# Altium PCB Battery_Operated Node.PcbDoc
Units mm, origin at the board's own origin, x right, y up, seen from the top; angles counter-clockwise.
Board outline 41.22 x 57.73 mm, 2 copper layers (Top, Bottom), stack 1.57 mm thick; 62 components, 53 nets, 236 pads, 55 vias.
Unrouted connection lines stored in the file: 1.
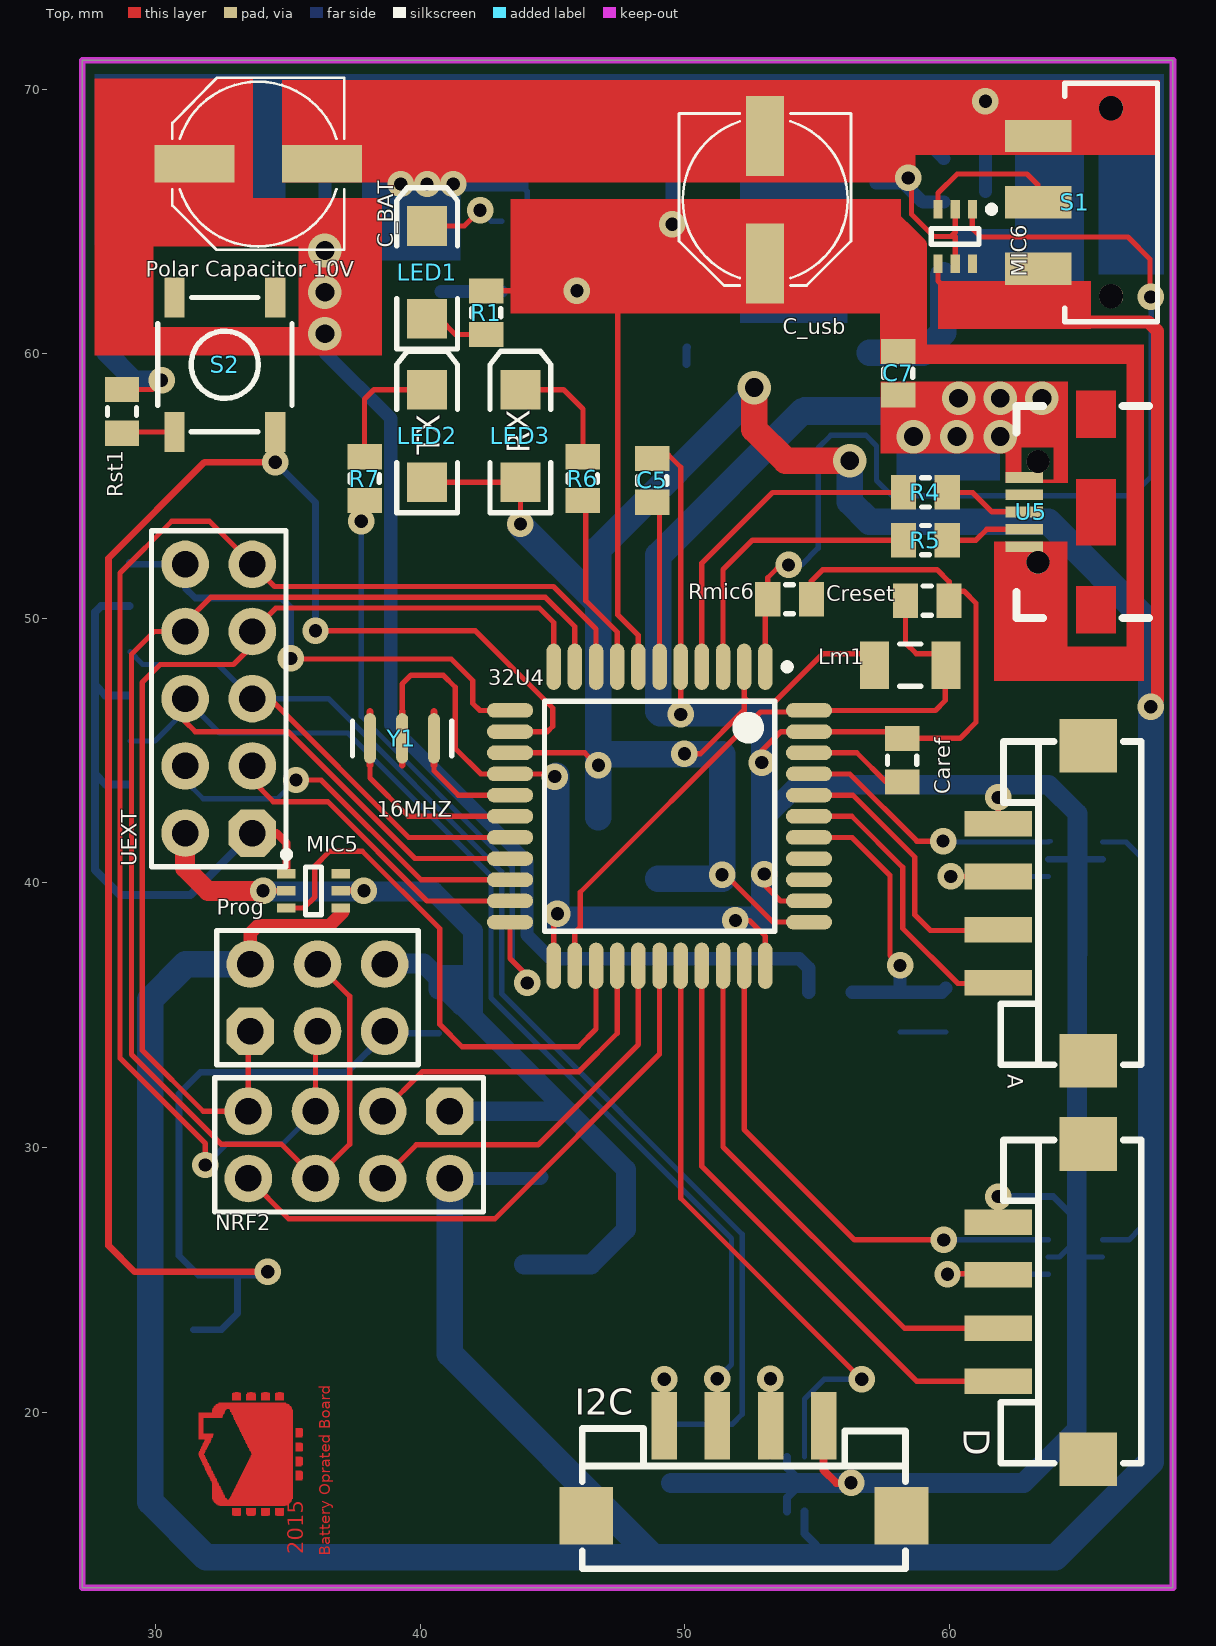
[diagram p0: Top view]
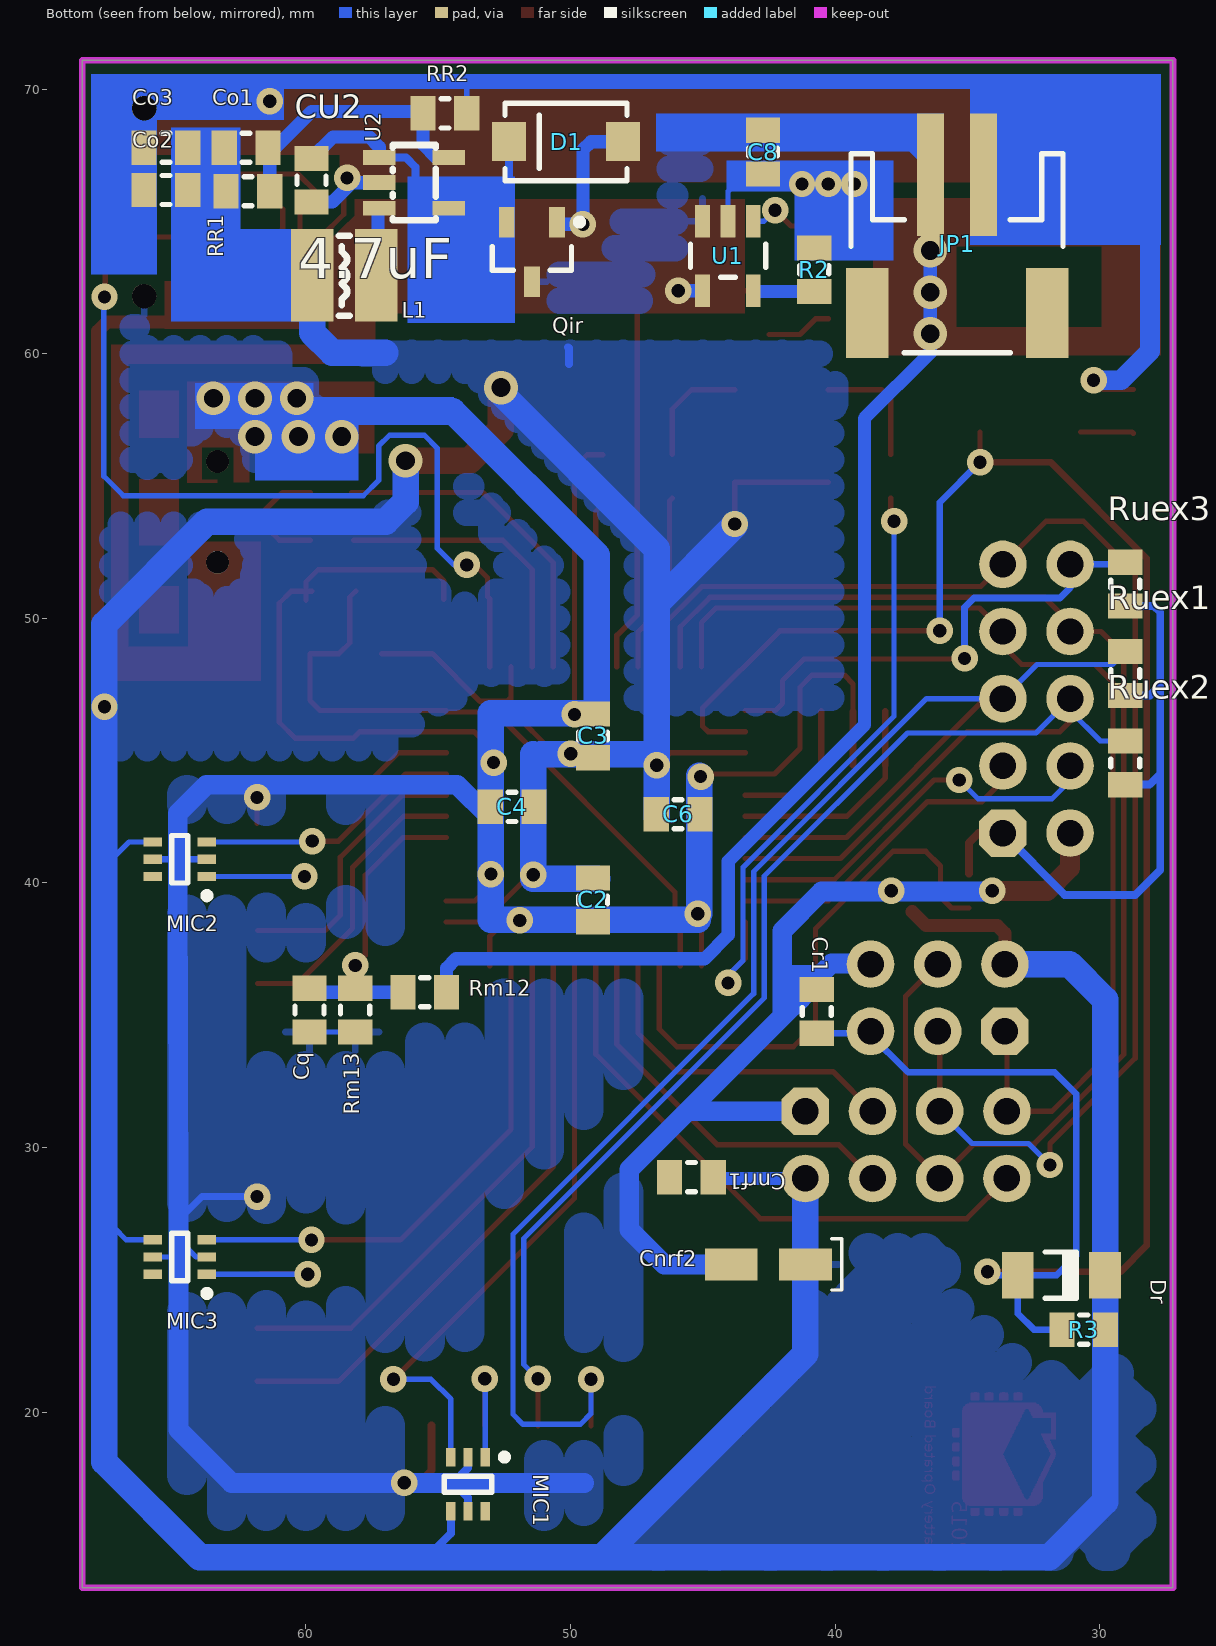
[diagram p1: Bottom view, seen from below]
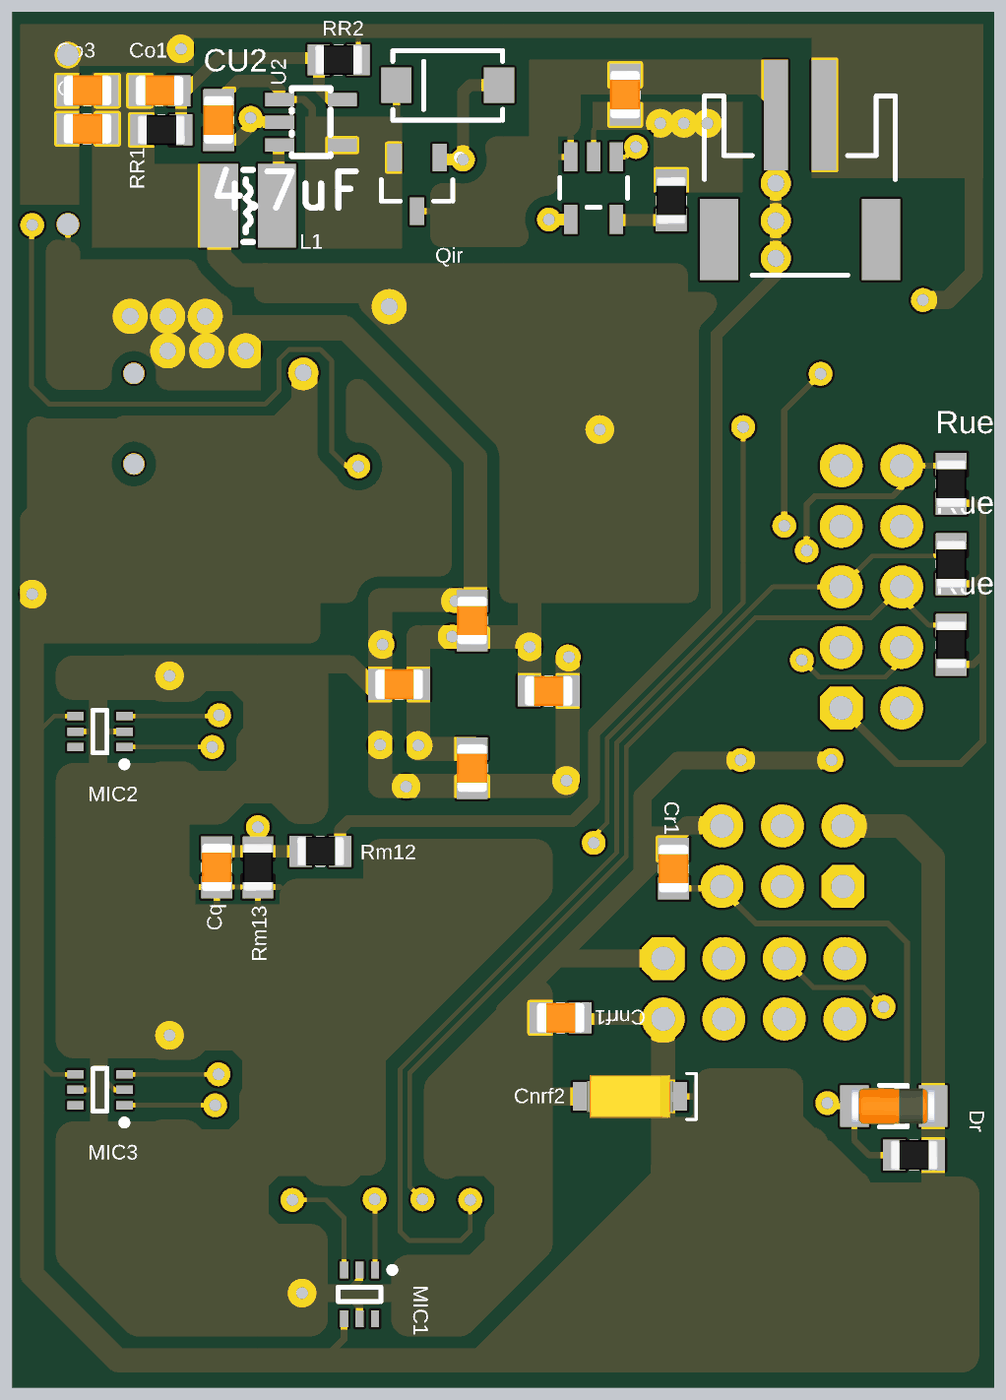
[diagram p2: 3D render of the assembled board from below, using the file's embedded part models]

## Layer stack, top to bottom
Top Solder: solder mask 0.0102, Solder Resist, Dk 3.5
Top: signal copper 0.035
Dielectric 1: core 1.5, FR-4, Dk 4.8
Bottom: signal copper 0.035
Bottom Solder: solder mask 0.0102, Solder Resist, Dk 3.5

## Board outline
27.229,13.36 27.229,71.095 68.453,71.095 68.453,13.36

## Design rules (kind name [scope] priority, off if disabled: settings)
Clearance POLY [InPolygon] p1: gap=0.5
Clearance mdViaVia [IsVia vs IsVia] p2: gap=0.203
Clearance mdPadVia [IsPad vs IsVia] p3: gap=0.203
Clearance mdPadPad [IsPad vs IsPad] p4: gap=0.203
Clearance mdWireVia [(InLayerClass('Signal Layers') AND IsTrack) vs IsVia] p5: gap=0.203
Clearance mdWirePad [(InLayerClass('Signal Layers') AND IsTrack) vs IsPad] p6: gap=0.203
Clearance mdWireWire [(InLayerClass('Signal Layers') AND IsTrack) vs (InLayerClass('Signal Layers') AND IsTrack)] p7: gap=0.203
Clearance [All] p8: gap=0.2
HoleSize [All] p1: absolutevalues=TRUE maxlimit=2540 minlimit=0.381 maxpercent=80.000 minpercent=20.000
HoleToHoleClearance [All] p1: gap=0.203 allowstackedmicrovias=TRUE
PolygonConnect ThermalVias [IsVia] p1: connectstyle=Direct reliefconductorwidth=0.254 reliefentries=4 polygonreliefangle="90 Angle" airgapwidth=0.254
PolygonConnect [All] p2: connectstyle=Relief reliefconductorwidth=0.254 reliefentries=4 polygonreliefangle="90 Angle" airgapwidth=0.254
RoutingVias [All] p1: holewidth=0.5 width=1 viastyle="Through Hole" minholewidth=0.5 minwidth=1 maxholewidth=0.711 maxwidth=1.27
SilkToSilkClearance [All] p1 off: silktosilkclearance=0.254
SilkToSolderMaskClearance [IsPad] p1 off: minsilkscreentomaskgap=0.254 clearancetoexposedcopper=TRUE
SolderMaskExpansion [All] p1: expansion=0.102
Width [All] p1: maxlimit=2540 minlimit=0.2 preferedwidth=0.254
26 further rules are at their usual default settings.

## Components (designator, comment, footprint, x,y, rotation, side; value= is the part's Value field where it differs from the comment)
32U4 "ATmega32U4-AU" 44ML_N 49.047,42.52 r270 top
A "TWIG-4P-2.0-SMD" 4P-SMD-2.0 61.849,39.243 r270 top
C2 "100nF" SMD_CAP_0805 49.149,38.532 r90 bottom
C3 "100nF" SMD_CAP_0805 49.149,46.38 r270 bottom
C4 "100nF" SMD_CAP_0805 53.035,42.875 r180 bottom
C5 "1uF" SMD_CAP_0805 48.768,56.038 r270 top
C6 "4.7uF" SMD_CAP_0805 45.11,42.596 r0 bottom
C7 "4.7uF" SMD_CAP_0805 58.064,58.445 r90 top
C8 "4.7uF" SMD_CAP_0805 42.723,66.802 r90 bottom
C_BAT "Polar Capacitor 10V" PANASONIC_D 33.884,67.183 r180 top
C_usb "Polar Capacitor 10V" PANASONIC_D 53.035,65.837 r270 top
Caref "100nF" SMD_CAP_0805 58.217,45.466 r270 top
Cnrf1 "100nF" SMD_CAP_0805 44.602,28.88 r0 bottom
Cnrf2 "4.7uF 6.3V Tantalum" "CAPP 1206 (3216X18L) Size A" 41.123,25.578 r0 bottom
Co1 "22pF" SMD_CAP_0805 61.441,67.793 r0 bottom
Co2 "22uF" SMD_CAP_0805 66.116,66.192 r180 bottom
Co3 "22uF" SMD_CAP_0805 66.116,67.793 r180 bottom
Cq "100nF" SMD_CAP_0805 59.868,36.017 r270 bottom
Cr1 "4.7nF" SMD_CAP_0805 40.691,34.315 r90 bottom
Creset "10nF" SMD_CAP_0805 59.995,50.673 r180 top
CU2 "4.7uF" SMD_CAP_0805 59.792,65.735 r90 bottom
D "TWIG-4P-2.0-SMD" 4P-SMD-2.0 61.849,24.181 r270 top
D1 "B340A" SMA-DIODE 50.165,68.021 r0 bottom
Dr "1N4148" LL4148 31.445,25.171 r180 bottom
I2C "TWIG-4P-2.0-SMD" 4P-SMD-2.0 52.248,19.482 r180 top
JP1 "JST-2" JST-2-SMD 35.382,63.068 r0 bottom
L1 "2.2uH/1.5A/DCR<0.1R/CD32" CD32 58.547,62.967 r0 bottom
LED1 "RED" "LED SMD 1206" 40.259,63.081 r90 top
LED2 "Orange" "LED SMD 1206" 40.259,56.896 r90 top
LED3 "Green" "LED SMD 1206" 43.79,56.896 r90 top
Lm1 "Inductor" INDC3216 58.522,48.235 r180 top
MIC1 "MIC94060" mic94060 53.873,17.272 r270 bottom
MIC2 "MIC94060" mic94060 64.77,40.894 r0 bottom
MIC3 "MIC94060" mic94060 64.77,25.857 r0 bottom
MIC5 "MIC94060" mic94060 35.966,39.7 r0 top (schematic designator MIC1)
MIC6 "MIC94060" mic94060 60.223,64.44 r270 top (schematic designator MIC1)
NRF2 "Header 4X2" HDR2X4 41.123,31.369 r180 top
Prog "Header 3X2" HDR2X3 33.579,34.392 r0 top
Qir "IRLML6401" Micro3_N 51.46,63.856 r270 bottom
R1 "330" "RES 0805 (2012X06L)" 42.494,62.381 r270 top
R2 "10k" "RES 0805 (2012X06L)" 40.792,62.357 r90 bottom
R3 "4.7k" "RES 0805 (2012X06L)" 31.42,23.114 r180 bottom
R4 "22" "RES 0805 (2012X06L)" 59.922,54.762 r180 top
R5 "22" "RES 0805 (2012X06L)" 59.922,52.959 r180 top
R6 "330" "RES 0805 (2012X06L)" 46.152,56.112 r270 top
R7 "330" "RES 0805 (2012X06L)" 37.897,56.112 r270 top
Rm12 "1M" "RES 0805 (2012X06L)" 54.686,35.865 r0 bottom
Rm13 "470K" "RES 0805 (2012X06L)" 58.141,36.017 r270 bottom
Rmic6 "4.7K" "RES 0805 (2012X06L)" 53.137,50.721 r0 top
RR1 "4.99K" "RES 0805 (2012X06L)" 63.017,66.144 r180 bottom
RR2 "1.1K" "RES 0805 (2012X06L)" 53.924,69.088 r0 bottom
Rst1 "330" "RES 0805 (2012X06L)" 28.727,58.649 r270 top
Ruex1 "4.7K" "RES 0805 (2012X06L)" 29.032,47.092 r90 bottom
Ruex2 "4.7K" "RES 0805 (2012X06L)" 29.032,43.713 r90 bottom
Ruex3 "4.7K" "RES 0805 (2012X06L)" 29.032,50.47 r90 bottom
S1 "" SWITCH-SPDT-SMD 66.116,65.735 r270 top
S2 "!RESET" TACTILE_SWITCH_SMD 32.614,59.588 r90 top
U1 "MCP73831" SOT23-5#1 44.044,63.71 r0 bottom
U2 "SY8009AAAC(SOT23-5)" SOT23-5#2 55.905,66.472 r0 bottom (schematic designator U1)
U5 "USB AB Connector(micro usb)" USB-AB-MICRO-SMD_V03 65.557,54.026 r180 top
UEXT "Header 5X2" HDR2X5 33.655,41.885 r90 top
Y1 "16MHZ" RESONATOR-SMD 39.319,45.466 r180 top

## Footprints (in the part's own frame and the unit in brackets; to place one, negate y for a bottom-side part, rotate by r counter-clockwise, add the part's x,y. Pads: shape width x height; smd on the part's side, far side on the other; paste and mask are expansions set on the pad)
4P-SMD-2.0 [mil]
  rect 38x100 smd: 1(-118.11,0) 2(-39.37,0) 3(40,0) 4(119,0)
  rect 80x86 smd: SS1(-234.09,134) SS2(235,134)
  silkscreen extent -240,4 241,213
44ML_N [mm] "Thin QFP, 44-Leads, Body 10x10mm, Pitch 0.8mm, IPC Medium Density"
  oval 1.75x0.55 smd: 1(-5.65,4) 2(-5.65,3.2) 3(-5.65,2.4) 4(-5.65,1.6) 5(-5.65,0.8) 6(-5.65,0) 7(-5.65,-0.8) 8(-5.65,-1.6) 9(-5.65,-2.4) 10(-5.65,-3.2) 11(-5.65,-4) 23(5.65,-4) 24(5.65,-3.2) 25(5.65,-2.4) 26(5.65,-1.6) 27(5.65,-0.8) 28(5.65,0) 29(5.65,0.8) 30(5.65,1.6) 31(5.65,2.4) 32(5.65,3.2) 33(5.65,4)
  oval 0.55x1.75 smd: 12(-4,-5.65) 13(-3.2,-5.65) 14(-2.4,-5.65) 15(-1.6,-5.65) 16(-0.8,-5.65) 17(0,-5.65) 18(0.8,-5.65) 19(1.6,-5.65) 20(2.4,-5.65) 21(3.2,-5.65) 22(4,-5.65) 34(4,5.65) 35(3.2,5.65) 36(2.4,5.65) 37(1.6,5.65) 38(0.8,5.65) 39(0,5.65) 40(-0.8,5.65) 41(-1.6,5.65) 42(-2.4,5.65) 43(-3.2,5.65) 44(-4,5.65)
  silkscreen extent -5.77,-4.35 4.35,4.95, body extent -5,-5 5,5, height 1.2
"CAPP 1206 (3216X18L) Size A" [mm] "Chip Capacitor, 2-Leads, Body 3.2x1.6mm, IPC High Density, chip Tantalum"
  rect 1.999x1.199 smd: 1(0,0) 2(2.8,0)
  silkscreen extent -1.38,-0.97 -0.99,0.97, body extent -0.43,-0.9 3.21,0.9, height 1.8
CD32 [mil] "CD32"
  rect 63x138 smd: 1(-47.24,0) 2(48,0)
  silkscreen extent -8,-59 8,60
HDR2X3 [mm]
  oct 1.8x1.8 hole 1: 1(0,0)
  round 1.8 hole 1: 2(0,2.54) 3(2.54,0) 4(2.54,2.54) 5(5.08,0) 6(5.08,2.54)
  silkscreen extent -1.27,-1.27 6.35,3.81
HDR2X4 [mm]
  oct 1.8x1.8 hole 1: 1(0,0)
  round 1.8 hole 1: 2(0,2.54) 3(2.54,0) 4(2.54,2.54) 5(5.08,0) 6(5.08,2.54) 7(7.62,0) 8(7.62,2.54)
  silkscreen extent -1.27,-1.27 8.89,3.81
HDR2X5 [mm]
  oct 1.8x1.8 hole 1: 1(0,0)
  round 1.8 hole 1: 2(0,2.54) 3(2.54,0) 4(2.54,2.54) 5(5.08,0) 6(5.08,2.54) 7(7.62,0) 8(7.62,2.54) 9(10.16,0) 10(10.16,2.54)
  silkscreen extent -1.27,-1.27 11.43,3.81
INDC3216 [mm] "Chip Inductor, Body 3.2x1.6mm, IPC High Density"
  rect 1.1x1.8 smd: 1(-1.35,0) 2(1.35,0)
  silkscreen extent -0.4,-0.8 0.4,0.8
JST-2-SMD [mil] "JST-2-SMD"
  rect 40x182 smd: 1(-39.37,-145.67) 2(40,-145.67)
  rect 63x134 smd: NC1(-133.86,60) NC2(134,60)
  silkscreen extent -157,-177 158,119
"LED SMD 1206" [mm]
  rect 1.5x1.5 smd: 1(-1.75,0) 2(1.75,0)
  silkscreen extent -2.9,-1.15 3.2,1.15, body extent -1.65,-0.76 1.65,0.69, height 1.36
LL4148 [mm] "MELF Diode, 2-Leads, Body 3.5x1.4mm, IPC Medium Density"
  rect 1.2x1.75 smd: 1(-1.65,0) 2(1.65,0)
  silkscreen extent -0.61,-0.88 0.57,0.88, body extent -1.78,-0.75 1.72,0.75, height 1.55
mic94060 [mm] "6 pin sc70"
  rect 0.7x0.35 smd: 1(-1.025,0.65) 2(-1.025,0) 3(-1.025,-0.65) 4(1.025,-0.65) 5(1.025,0) 6(1.025,0.65)
  silkscreen extent -1.15,-0.9 0.3,1.5, body extent -0.58,-0.9 0.58,0.9, height 1.1
Micro3_N [mm] "SOT23, 3-Leads, Body 2.9x1.3mm, Pitch 0.95mm, Lead Span 2.3mm, IPC Medium Density"
  rect 1.15x0.6 smd: 1(-1.125,0.95) 2(-1.125,-0.95) 3(1.125,0)
  silkscreen extent -1.25,-1.5 0.7,1.92, body extent -0.7,-1.5 0.7,1.5, height 1.12
PANASONIC_D [mil]
  rect 119x56 smd: +(95,0) -(-94.49,0)
  silkscreen extent -128,-128 128,128
"RES 0805 (2012X06L)" [mm] "Chip Resistor, 2-Leads, Body 2.0x1.3mm, IPC High Density _ (0.100 W)"
  rect 0.95x1.3 smd: 1(0,0) 2(1.65,0)
  silkscreen extent 0.67,-0.55 0.97,0.55, body extent -0.19,-0.63 1.84,0.64, height 0.6
RESONATOR-SMD [mil]
  rrect100% 18x75 smd: 1(-47.24,0) 2(0,0) 3(48,0)
  Top lines w10: 48,40 48,0 48,-40 ; 0,40 0,0 0,-40 ; -47.24,40 -47.24,0 -47.24,-40
  silkscreen extent -74,-25 74,26
SMA-DIODE [mil] "SMA-DIODE"
  rect 50x58 smd: A(-84.65,0) C(85,0)
  silkscreen extent -91,-57 91,58
SMD_CAP_0805 [mm]
  rect 0.95x1.3 smd: 1(0,0) 2(1.65,0)
  silkscreen extent 0.67,-0.55 0.97,0.55, body extent -0.19,-0.64 1.84,0.63, height 0.65
SOT23-5#1 [mil] "SOT23-5"
  rect 22x48 smd: 1(-37.4,-51.18) 2(0,-51.18) 3(38,-51.18) 4(38,52) 5(-37.4,52)
  silkscreen extent -56,-17 56,32
SOT23-5#2 [mil] "SOT23-5"
  rect 48x22 smd: 1(52,-37.4) 2(52,0) 3(52,38) 4(-51.18,38) 5(-51.18,-37.4)
  silkscreen extent -32,-56 32,56
SWITCH-SPDT-SMD [mil]
  round 36 hole 36: 1(-139.76,0) 1(140,0)
  rect 48x99 smd: 1(-98.43,-108.27) 2(0,-108.27) 3(99,-108.27)
  silkscreen extent -177,-69 178,69
TACTILE_SWITCH_SMD [mil] "TACTILE_SWITCH_SMD"
  rect 60x30 smd: 1(-100,75) 2(100,75) 3(-100,-75) 4(100,-75)
  silkscreen extent -100,-100 100,100
USB-AB-MICRO-SMD_V03 [mil] "USB-AB-MICRO-SMD_V03"
  round 34 hole 34: 1(87,75) 1(87,-74.8)
  rect 56x16 smd: D+1(107,0) D-1(107,26) GND1(107,-51.18) ID1(107,-25.59) VBUS1(107,52)
  Top region: -29.53,-180.47 30,-180.47 30,-109.61 -29.53,-109.61
  Top region: -29.49,-49.21 30.04,-49.21 30.04,50 -29.49,50
  Top region: -29.53,110 30,110 30,181 -29.53,181
  silkscreen extent -79,-157 119,158

## Part data
32U4: "8-bit AVR Microcontroller, 44-pin TQFP, Industrial Grade (-40°C to 85°C)"
A D I2C: library part TWIG-4P-2.0-SMD-FEMALE-REINFORCE'DD', "part num:1125S-SMT-4P URL: http://oom.lt/J204S"
C2 C3 C4 C5 C6 C7 C8 Caref Cnrf1 Co1 Co2 Co3 Cq Cr1 Creset CU2: library part Cap-Bipolar, "ceramic capacitor"
C_BAT C_usb: library part CAP_POLD
Cnrf2: library part Cap-Polar, "Tantalum Capacitor Size A"
D1: library part DIODE-SCHOTTKY-B340A, "Schottky diodes in SFE's production catalog<p> /  / BAT20J 1A 23V 0.62Vf<br> / RB751 120mA 40V 0.37Vf<br> / PMEG4005EJ 0.5A 40V 0.42Vf<br> / MBRA140 1A 40V 0.5Vf<br> / B340A  3A 40V SMA <br>"
Dr: library part "Diode 1N4148", "High Conductance Fast Diode"
JP1: library part M02-JST-2MM-SMT, "Standard 2-pin 0.1\" header. Use with <br> / - straight break away headers ( PRT-00116)<br> / - right angle break away headers (PRT-00553)<br> / - swiss pins (PRT-00743)<br> / - machine pins (PRT-00117)<br> / - female headers (PRT-00115)<br><br> /  /  Molex polarized connector foot print use with: PRT-08233 with associated crimp pins and housings.<br><br> /  / 2.54_SCREWTERM for use with  PRT-10571.<br><br> /  / 3.5mm Screw Terminal footprints for  PRT-08084<br><br> /  / 5mm Screw Terminal footprints for use with PRT-08433"
L1: library part L-CD32
LED1 LED2 LED3: library part LED, "LED"
MIC1 MIC2 MIC3 MIC5 MIC6: "MIC94060YC6, SC-70-6"
NRF2: "Header, 4-Pin, Dual row"
Prog: "Header, 3-Pin, Dual row"
Qir: "HEXFET Power MOSFET"
R1 R2 R3 R4 R5 R6 R7 Rm12 Rm13 Rmic6 RR1 RR2 Rst1 Ruex1 Ruex2 Ruex3: library part Resistor, "Resistor"
S1: library part SWITCH-SPDTSMD2, "part num:AYZ0102AGRLC or JS102011SAQN"
S2: library part SWITCH-MOMENTARY-2SMD, "Various NO switches- part num:TS-1518S"
U1: "Miniature single cell, fully integrated Li-Ion, Li-polymer charge management controller<br> / http://ww1.microchip.com/downloads/en/DeviceDoc/21984a.pdf<br> / IC-09995"
U2: library part SY8008
U5: library part USB-ABCONN-11794, "part num:1125S-SMT-4P"
UEXT: "Header, 5-Pin, Dual row"
Y1: library part RESONATOR8MHZ, "Resonator ,Small SMD resonator,Used, eg, on the Arduino Pro/ Pro Mini boards.  16MHz- XTAL-08895"

## Via types
v1: diameter 1, hole 0.5, Top to Bottom, 44 vias
v2: diameter 1.27, hole 0.711, Top to Bottom, 11 vias

## Nets (pads, with @x,y where several pads share a name; then routed paths per layer and width w, separated by ;. In a path a pad name is that pad's centre, name@x,y a point inside that pad or via, vN(x,y) a via of type N, cw(c..) or ccw(c..) an arc to the next point about the centre after c; other vN are vias at no path point)
3.3V: 32U4.2 32U4.14 32U4.34 C2.2 C3.2 C4.2 C6.2 Cnrf1.1 Cnrf2.1 Co1.2 Co2.2 Co3.2 Dr.2 L1.2 LED2.1 LED3.1 Lm1.2 MIC1.4 MIC2.4 MIC3.4 MIC5.4 MIC6.4 NRF2.2 Prog.2 R3.2 RR1.1 S1.3 | length 262.9
  Top w0.2: LED2.1 LED3.1 v1(43.79,53.569) ; 32U4.14 46.216,44.92 46.736,44.399 v1(46.736,44.45) ; v1(49.987,44.882) 50.597,44.882 52.247,46.532 52.247,47.016 ; v1(51.41,40.31) 51.537,40.31 53.327,38.52 32U4.34 ; 32U4.2 52.247,47.016 ; Lm1.2@57.146,48.666 55.22,48.666 53.416,46.863 52.4,46.863 52.247,47.016 ; MIC6.4 59.573,62.753 60.198,62.128 62.941,62.128 63.341,62.528 ; S1.3@63.341,63.221 63.341,62.528 ; 64.795,61.201 64.428,61.201 63.341,62.288 63.341,62.528
  Top w0.5: Prog.2 33.579,38.1 33.867,38.388 36.56,38.388 MIC5.4@37.084,38.913 ; 64.795,61.201 67.534,61.201 67.876,60.858 67.876,46.921 v1(67.615,46.66)
  Top w1: v2(52.629,58.725) 52.629,57.15 53.823,55.956 v2(56.236,55.956)
  Bottom w0.2: 65.447,16.298 67.234,18.085 67.234,26.949 ; MIC3.4 66.792,26.507 67.234,26.949 ; MIC2.4 66.685,41.544 67.234,40.996 67.234,26.949
  Bottom w0.3: 50.063,59.614 50.063,60.223 50.089,60.249 ; MIC1.4 54.523,15.403 55.423,14.503 ; RR1.1@62.891,66.017 Co1.2@62.891,67.894
  Bottom w0.5: NRF2.2 44.552,28.829 Cnrf1.1
  Bottom w1: Prog.2 31.14,36.932 29.794,35.585 29.794,16.612 31.902,14.503 48.819,14.503 ; NRF2.2 Cnrf2.1 41.123,22.2 48.819,14.503 ; v1(43.79,53.569) 43.815,53.543 43.815,53.492 46.736,50.571 ; C6.2@46.736,42.476 v1(46.736,44.45) v1@46.736,44.856 ; C2.2@48.997,40.157 51.41,40.157 v1(51.41,40.31) 51.41,44.856 ; 51.13,44.856 v1@46.736,44.856 ; v2@52.73,58.623 46.736,52.629 46.736,50.571 ; v2(56.236,55.956) 56.236,54.407 56.985,53.657 63.741,53.657 67.626,49.773 67.626,18.121 64.008,14.503 55.423,14.503 48.819,14.503 ; 57,60.046 59.004,60.046 59.766,60.808 L1.2 ; v1@46.736,44.856 46.736,50.571
5V: 32U4.7 C7.2 C_usb.+ D1.A Qir.1 R1.1 U1.4 U5.VBUS1 | length 55
  Top w0.2: R1.1 44.093,62.381 44.171,62.459 ; 45.009,63.678 45.009,63.703 45.745,63.703 ; 32U4.7 48.247,49.359 47.473,50.133 47.473,61.976 45.745,63.703 ; 57.302,63.703 45.745,63.703 ; 57.302,63.779 57.937,63.779 58.318,63.398 58.318,60.554 58.725,60.147 66.904,60.147 ; 64.186,47.904 66.523,47.904
  Top w0.5: 57.531,65.507 58.903,64.135 58.903,63.195
  Bottom w0.5: U1.4 45.016,62.382 v1(45.923,62.382) ; D1.A 49.225,68.021 49.53,67.716 v1(49.53,64.897) 50.427,64.897 Qir.1
A0: 32U4.36
A1: 32U4.37
A2: 32U4.38 Cq.1 Rm12.2 Rm13.1 | length 11.7
  Top w0.2: 32U4.38 56.328,41.72 57.76,40.288 57.76,37.262 v1(58.141,36.881)
  Bottom w0.5: Rm12.2 59.715,35.865 Cq.1 ; Rm13.1 v1(58.141,36.881)
A3: 32U4.39 A.4 | length 11.1
  Top w0.2: 32U4.39 56.312,42.52 58.242,40.589 58.242,38.278 60.325,36.195 A.4@61.824,36.195
A4: 32U4.40 A.3 | length 10.5
  Top w0.2: 32U4.40 56.35,43.32 58.699,40.97 58.699,38.786 59.284,38.202 A.3@61.824,38.202
A5: 32U4.41 MIC2.3 | length 10.2
  Top w0.2: 32U4.41 56.236,44.12 58.776,41.58 v1(59.766,41.58)
  Bottom w0.178: MIC2.3@63.745,41.58 MIC2.3@63.83,41.58
  Bottom w0.2: v1(59.766,41.58) 59.802,41.544 MIC2.3
CE1NRF: 32U4.26 NRF2.3 | length 12.6
  Top w0.2: NRF2.3 40.081,32.868 45.999,32.868 47.447,34.316 32U4.26
CSN1NRF: 32U4.27 NRF2.4 | length 14.7
  Top w0.2: NRF2.4 39.853,30.099 44.45,30.099 48.247,33.896 32U4.27
D0: 32U4.20 UEXT.4 | length 15
  Top w0.2: v1(35.306,43.891) 36.257,43.891 40.029,40.12 32U4.20
  Bottom w0.2: UEXT.4 31.115,43.866 31.801,43.18 34.595,43.18 v1(35.306,43.891)
D1: 32U4.21 UEXT.3 | length 12.2
  Top w0.2: UEXT.3 33.655,43.866 34.447,43.074 36.505,43.074 40.259,39.32 32U4.21
D2: 32U4.19 I2C.3 Ruex2.2 UEXT.6 | length 57.4
  Top w0.2: UEXT.6 31.115,46.101 31.496,45.72 34.999,45.72 39.799,40.92 32U4.19 ; I2C.3 v1(51.232,21.26)
  Bottom w0.2: Ruex2.2 29.971,45.363 31.115,46.507 UEXT.6 32.41,45.669 37.262,45.669 42.675,40.256 42.675,35.647 51.768,26.554 51.768,21.796 v1(51.232,21.26)
D3: 32U4.18 I2C.4 Ruex1.2 UEXT.5 | length 60
  Top w0.2: UEXT.5 34.324,46.965 39.569,41.72 32U4.18 ; I2C.4 v1(49.225,21.234)
  Bottom w0.2: Ruex1.2 29.514,48.26 32.36,48.26 UEXT.5 36.537,46.965 43.078,40.423 43.078,35.814 52.172,26.721 52.172,19.914 51.791,19.533 49.632,19.533 49.225,19.939 v1(49.225,21.234)
D4: 32U4.25 MIC5.3 | length 21.1
  Top w0.2: MIC5.3 35.596,39.05 36.017,39.472 36.017,40.64 36.576,41.199 37.809,41.199 40.742,38.266 40.742,34.646 41.58,33.807 45.974,33.807 46.647,34.481 32U4.25
D5: 32U4.31 D.3 | length 20.1
  Top w0.2: 32U4.31 51.447,30.023 58.305,23.165 D.3
D7: 32U4.1 MIC6.1 Rmic6.1 | length 40.8
  Top w0.2: 32U4.1 53.047,50.734 53.137,50.823 53.137,51.537 53.772,52.172 v1(53.924,52.019) ; MIC6.1 60.873,64.73 61.189,64.414 66.751,64.414 67.589,63.576 67.589,62.103 67.615,62.128 v1(67.615,62.154)
  Bottom w0.2: v1(53.924,52.019) 54.407,52.019 55.042,52.654 55.042,56.439 55.524,56.921 56.845,56.921 57.252,56.515 57.252,55.22 57.836,54.635 66.904,54.635 67.64,55.372 67.64,62.179 v1(67.615,62.154)
D8: 32U4.28 NRF2.8 | length 22.1
  Top w0.2: NRF2.8 35.027,27.305 42.824,27.305 49.047,33.528 32U4.28
D9: 32U4.29 MIC1.3 | length 23.1
  Top w0.2: 32U4.29 49.847,28.08 v1(56.693,21.234)
  Bottom w0.2: MIC1.3 54.523,20.487 55.27,21.234 v1(56.693,21.234)
D10: 32U4.30 D.4 | length 22.2
  Top w0.2: 32U4.30 50.647,29.286 58.775,21.158 D.4
D11: 32U4.12 Ruex3.2 UEXT.10 | length 18.9
  Top w0.2: v1(35.103,48.489) 35.128,48.463 41.173,48.463 41.986,47.65 41.986,46.787 42.253,46.52 32U4.12
  Bottom w0.254: Ruex3.2@29.007,52.12 29.082,52.045 UEXT.10 31.115,51.156 31.496,50.775 34.747,50.775 35.103,50.419 v1(35.103,48.489)
D13: 32U4.32 MIC3.3 | length 19.4
  Top w0.2: 32U4.32 52.247,30.684 56.424,26.507 v1(59.792,26.507)
  Bottom w0.2: v1(59.792,26.507) MIC3.3
D14: 32U4.8 R6.2 | length 6.9
  Top w0.2: R6.2@46.152,54.546 46.257,54.441 46.257,50.669 47.447,49.479 32U4.8
D15: 32U4.9 NRF2.5 Prog.3 UEXT.9 | length 53.7
  Top w0.2: v1(31.877,29.337) 31.877,30.15 28.651,33.376 28.651,51.714 30.607,53.67 32.029,53.67 UEXT.9 34.493,51.206 45.034,51.206 46.647,49.593 32U4.9 ; NRF2.5 36.043,34.315 Prog.3
  Bottom w0.2: v1(31.877,29.337) 32.69,30.15 34.823,30.15 NRF2.5
D16: 32U4.10 NRF2.6 Prog.4 UEXT.8 | length 53
  Top w0.2: Prog.4 37.338,35.712 37.338,30.124 NRF2.6 34.747,30.124 32.473,30.124 29.086,33.511 29.086,48.644 29.947,49.505 UEXT.8 31.115,49.835 32.077,50.797 44.733,50.797 45.847,49.683 32U4.10
D17: 32U4.11 NRF2.7 Prog.1 UEXT.7 | length 40.9
  Top w0.2: Prog.1 33.503,34.315 NRF2.7 31.798,31.369 29.489,33.678 29.489,47.574 30.175,48.26 32.944,48.26 33.655,48.971 UEXT.7 34.544,50.394 44.501,50.394 45.047,49.847 32U4.11
D+: 32U4.4 R4.2 | length 12.7
  Top w0.2: 32U4.4 50.647,52.095 53.314,54.762 R4.2
D-: 32U4.3 R5.2 | length 10.9
  Top w0.2: 32U4.3 51.447,51.841 52.565,52.959 R5.2@58.192,52.959
GND: 32U4.5 32U4.15 32U4.23 32U4.33 32U4.35 32U4.43 A.1 C2.1 C3.1 C4.1 C5.1 C6.1 C7.1 C8.1 C_BAT.- C_usb.- Caref.1 Cnrf1.2 Cnrf2.2 Co2.1 Co3.1 Cq.2 Cr1.2 Creset.1 CU2.1 D.1 I2C.1 JP1.1 MIC1.2 MIC1.5 MIC2.2 MIC2.5 MIC3.2 MIC3.5 MIC5.2 MIC5.5 MIC6.2 MIC6.5 NRF2.1 Prog.6 R2.2 Rm13.2 Rmic6.2 RR2.1 Rst1.1 S1.1 U1.2 U2.2 U5.GND1 UEXT.2 Y1.2 | length 239.1
  Top w0.2: Rst1.1 29.87,58.649 v1(30.226,59.004) ; v1(34.061,39.7) MIC5.2 MIC5.2@35.17,39.7 ; MIC5.5@37.322,39.751 37.372,39.7 v1(37.871,39.7) ; 39.319,46.482 39.319,47.523 39.649,47.854 40.869,47.854 41.326,47.396 41.326,45.085 42.291,44.12 32U4.15 v1@44.882,44.12 ; 32U4.23 45.047,38.976 v1(45.187,38.837) ; C5.1@48.768,56.186 49.377,56.186 49.847,55.715 32U4.5 v1(49.847,46.368) ; v1(51.918,38.583) 52.451,38.583 53.047,37.986 32U4.33 ; v1(52.908,44.548) 52.908,44.983 53.644,45.72 32U4.43 57.963,45.72 Caref.1 60.401,45.466 61.011,46.076 61.011,50.571 60.554,51.029 Creset.1@59.995,51.029 ; v1(53.01,40.335) 53.01,39.929 53.619,39.32 32U4.35 ; Rmic6.2 54.787,51.409 55.22,51.841 59.538,51.841 59.995,51.384 Creset.1@59.995,51.029 ; 57.734,67.183 58.786,68.235 S1.1@63.341,68.235 ; v1@58.572,66.751 58.572,65.278 59.413,64.438 60.07,64.438 60.223,64.591 MIC6.2 ; Creset.1@59.769,51.029 Creset.1@59.995,51.029 ; Creset.1 Creset.1@59.995,51.029 ; MIC6.5 60.223,64.438 ; A.1 v1(61.849,43.231)
  Top w0.3: I2C.1 55.248,17.803 55.728,17.323 v1(56.286,17.323)
  Top w0.75: UEXT.2 31.115,40.564 31.979,39.7 v1(34.061,39.7)
  Bottom w0.2: v1(41.25,66.421) 43.764,66.421 44.044,66.142 U1.2 ; RR2.1 53.924,70.079 ; 54.483,70.155 54.534,70.206 ; Rm13.2 Cq.2 ; MIC3.2 64.16,25.857 64.618,26.314 64.618,26.645 ; 64.821,25.857 MIC3.5
  Bottom w0.254: v1(61.849,28.143) 63.932,28.143 64.821,27.254 ; MIC2.2 64.516,40.894 64.846,40.564 ; 64.846,40.894 MIC2.5
  Bottom w0.3: JP1.1 34.382,69.592 ; R2.2@40.831,63.678 41.161,64.007 R2.2@41.072,64.007 ; MIC1.5 53.873,16.764 54.432,17.323 53.873,17.882 MIC1.2 ; 55.27,57.831 v2@60.345,57.831 ; 65.989,64.313 Co3.1@65.989,68.072
  Bottom w0.5: U2.2 58.268,66.472 59.004,65.735 CU2.1
  Bottom w0.75: 28.092,65.049 28.092,60.096 29.185,59.004 v1(30.226,59.004) ; v1(34.061,39.7) 34.087,39.675 40.508,39.675 41.997,38.185 41.997,35.128 ; Prog.6@38.71,36.957 40.132,36.957 40.691,36.398 Cr1.2 40.944,35.965 41.541,35.369 ; NRF2.1 45.339,31.369 ; 41.58,35.369 47.777,29.171 47.777,26.899 46.457,25.578 Cnrf2.2 ; 49.479,17.323 54.432,17.323 v1(56.286,17.323) 62.814,17.323 64.821,19.329 64.821,27.254 64.846,40.564 64.846,40.894 64.846,42.621 63.754,43.713 54.292,43.713 C4.1@53.047,42.469
  Bottom w1: v1@45.136,38.837 v1@45.136,44.044 ; v1@45.187,38.608 53.01,38.608 v1(53.01,40.335) 53.01,46.406 C3.1@49.073,46.406 ; C3.1@49.004,46.494 49.004,52.382 54.452,57.831 55.27,57.831
  other v1: 45.085,44.018 39.268,66.421 40.259,66.421 58.445,66.65 61.366,69.545
  other v2: 58.649,56.871 60.287,56.871 61.925,56.871 60.35,58.318 61.925,58.318 63.5,58.318
Net32U4_6: 32U4.6 C5.2 | length 6.6
  Top w0.2: C5.2@48.553,54.534 49.047,54.039 32U4.6
Net32U4_16: 32U4.16 Y1.1 | length 4.5
  Top w0.2: Y1.1 40.519,44.45 40.519,44.241 41.44,43.32 32U4.16
Net32U4_17: 32U4.17 Y1.3 | length 7.4
  Top w0.2: Y1.3 38.1,44.45 38.1,43.967 39.548,42.52 32U4.17
Net32U4_24: 32U4.24 32U4.44 Creset.2 Lm1.1 | length 25.2
  Top w0.2: 32U4.24 45.847,38.126 46.05,38.329 46.05,39.649 52.861,46.46 54.697,46.46 32U4.44 59.474,46.52 59.846,46.892 59.846,48.666 58.75,48.666 58.344,49.073 58.344,50.804 Creset.2@58.119,51.029
Net32U4_42: 32U4.42 Caref.2 | length 4
  Top w0.2: 32U4.42 56.503,44.92 57.606,43.816 Caref.2
NetA_2: A.2 MIC2.1 | length 5.5
  Top w0.2: v1(60.056,40.244) v1(60.056,40.244) A.2
  Bottom w0.2: v1(60.056,40.244) MIC2.1
NetCo1_1: Co1.1 RR1.2 RR2.2 U2.5 | length 10.5
  Bottom w0.5: U2.5 55.077,67.422 55.574,67.919 RR2.2 55.652,69.166 59.79,69.166 61.163,67.793 Co1.1 61.367,67.719 RR1.2
NetCU2_2: CU2.2 D1.C Qir.2 U2.1 U2.4 | length 11.9
  Bottom w0.3: D1.C 52.324,66.396 52.578,66.142 ; Qir.2 53.063,65.634 55.474,65.634 55.855,66.015 55.855,67.056 56.22,67.422 U2.1
  Bottom w0.5: U2.1 57.226,67.818 57.607,68.199 58.978,68.199 CU2.2
NetD_2: D.2 MIC3.1 | length 5.6
  Top w0.2: v1(59.934,25.207) 59.958,25.232 D.2@61.722,25.232
  Bottom w0.2: v1(59.934,25.207) MIC3.1
NetI2C_2: I2C.2 MIC1.1 | length 4.7
  Top w0.2: I2C.2@53.238,19.491 v1(53.238,21.26)
  Bottom w0.2: MIC1.1 53.223,21.245 v1(53.238,21.26)
NetL1_1: L1.1 U2.3 | length 2.6
  Bottom w0.5: U2.3@57.277,65.507 57.277,63.037 L1.1
NetLED1_1: LED1.1 R1.2 | length 2.5
  Top w0.2: LED1.1 40.726,61.331 41.326,60.731 R1.2
NetLED1_2: LED1.2 U1.1 | length 3.6
  Top w0.2: LED1.2 41.667,64.831 v1(42.266,65.43) v1@42.647,65.43
  Bottom w0.2: v1(42.266,65.43) 42.686,65.01 U1.1
NetLED2_2: LED2.2 R7.1 | length 4.6
  Top w0.2: R7.1@37.897,56.196 37.897,58.293 38.25,58.646 LED2.2
NetLED3_2: LED3.2 R6.1 | length 4.4
  Top w0.2: LED3.2 45.418,58.646 46.152,57.912 R6.1@46.152,56.196
NetMIC6_3: MIC6.3 S1.2 | length 5.5
  Top w0.2: MIC6.3 59.573,66.076 60.3,66.802 62.941,66.802 63.341,66.402 S1.2@63.341,65.735
NetR2_1: R2.1 U1.5 | length 2.3
  Bottom w0.5: R2.1 U1.5@43.061,62.357
NetR4_1: R4.1 U5.D+1 | length 3.3
  Top w0.2: R4.1@59.842,54.762 60.884,54.762 61.62,54.026 U5.D+1
NetR5_1: R5.1 U5.D-1 | length 3.2
  Top w0.2: R5.1@59.842,52.959 61.011,52.959 61.417,53.365 U5.D-1
NetRst1_2: Rst1.2 S2.1 | length 2
  Top w0.2: Rst1.2 28.777,57.048 S2.1
RESET: 32U4.13 Cr1.1 Dr.1 Prog.5 R3.1 S2.3 | length 84.9
  Top w0.2: v1(34.519,55.905) S2.3 ; v1(36.043,49.53) 42.088,49.53 45.009,46.609 45.009,45.923 44.805,45.72 32U4.13
  Top w0.254: v1(34.239,25.298) 29.21,25.298 28.221,26.287 28.221,52.275 31.852,55.905 v1(34.519,55.905)
  Bottom w0.254: R3.1 32.487,23.114 33.095,23.723 Dr.1 ; v1(34.239,25.298) 34.112,25.171 Dr.1 ; v1(34.519,55.905) 36.043,54.381 v1(36.043,49.53) ; Cr1.1 38.71,34.315 37.236,32.842 31.699,32.842 30.886,32.029 30.886,25.908 31.623,25.171 Dr.1
TX_LED: 32U4.22 R7.2 | length 23.8
  Top w0.2: v1(37.77,53.67) 37.897,53.543 R7.2@37.897,54.546 ; 32U4.22 43.397,37.146 44.044,36.5 v1(44.044,36.22)
  Bottom w0.2: v1(37.77,53.67) 37.77,46.302 43.482,40.59 43.482,37.062 44.044,36.5 v1(44.044,36.22)
UEXT_POWER: MIC5.1 Ruex1.1 Ruex2.1 Ruex3.1 UEXT.1 | length 24
  Top w0.3: UEXT.1 34.569,41.885 34.941,41.513 MIC5.1
  Bottom w0.3: 27.706,47.549 27.706,50.236 27.94,50.47 Ruex3.1@29.007,50.47 ; Ruex2.1 28.112,43.713 27.706,44.12 ; Ruex1.1 28.092,47.092 27.706,47.478 27.706,44.12 ; UEXT.1 31.318,39.548 28.651,39.548 27.706,40.493 27.706,44.12
V_BATT: C8.2 C_BAT.+ JP1.2 Qir.3 Rm12.1 U1.3 | length 54.8
  Bottom w0.5: JP1.2@36.398,67.386 JP1.2 v2(36.398,63.906) v2(36.398,62.332) v2(36.398,60.757) 36.398,60.046 38.887,57.556 38.887,45.966 44.035,40.819 44.035,38.033 44.933,37.135 54.331,37.135 54.686,36.779 Rm12.1
  Bottom w0.75: JP1.2@36.398,67.386 37.567,68.555 46.152,68.555
pads on no net: A.SS1 A.SS2 D.SS1 D.SS2 I2C.SS1 I2C.SS2 JP1.NC1 JP1.NC2 MIC1.6 MIC2.6 MIC3.6 MIC5.6 MIC6.6 S2.2 S2.4 U5.1 U5.ID1
copper on no net: | length 402.6
  Top w0.025: 31.648,18.364 31.648,18.466 ; 31.648,18.974 31.648,19.964 ; 31.674,18.288 31.674,18.517 ; 31.674,18.974 31.674,19.964 ; 31.699,18.237 31.699,18.593 ; 31.699,18.974 31.699,19.964 ; 31.725,18.186 31.725,18.618 ; 31.725,18.974 31.725,19.964 ; 31.75,18.136 31.75,18.694 ; 31.75,18.974 31.75,19.964 ; 31.775,18.085 31.775,18.72 ; 31.775,18.974 31.775,19.964 ; 31.801,18.009 31.801,18.796 ; 31.801,18.974 31.801,19.964 ; 31.826,17.983 31.826,18.847 ; 31.826,18.974 31.826,19.177 ; 31.826,19.787 31.826,19.964 ; 31.852,17.932 31.852,18.364 ; 31.852,18.44 31.852,18.898 ; 31.852,18.974 31.852,19.177 ; 31.852,19.787 31.852,19.964 ; 31.877,17.882 31.877,18.313 ; 31.877,18.491 31.877,18.948 ; 31.877,18.974 31.877,19.177 ; 31.877,19.787 31.877,19.964 ; 31.902,17.805 31.902,18.263 ; 31.902,18.567 31.902,19.177 ; 31.902,19.787 31.902,19.964 ; 31.928,17.755 31.928,18.212 ; 31.928,18.593 31.928,19.177 ; 31.928,19.787 31.928,19.964 ; 31.953,17.704 31.953,18.161 ; 31.953,18.644 31.953,19.177 ; 31.953,19.787 31.953,19.964 ; 31.979,17.653 31.979,18.11 ; 31.979,18.694 31.979,19.177 ; 31.979,19.787 31.979,19.964 ; 32.004,17.602 32.004,18.059 ; 32.004,18.745 32.004,19.177 ; 32.004,19.787 32.004,19.964 ; 32.029,17.551 32.029,18.009 ; 32.029,18.796 32.029,19.177 ; 32.029,19.787 32.029,19.964 ; 32.055,17.501 32.055,17.958 ; 32.055,18.847 32.055,19.177 ; 32.055,19.787 32.055,19.964 ; 32.08,17.45 32.08,17.907 ; 32.08,18.898 32.08,19.177 ; 32.08,19.787 32.08,19.964 ; 32.106,17.399 32.106,17.856 ; 32.106,18.948 32.106,19.177 ; 32.106,19.787 32.106,19.964 ; 32.131,17.348 32.131,17.78 ; 32.131,19.025 32.131,19.177 ; 32.131,19.787 32.131,19.964 ; 32.156,16.713 32.156,17.755 ; 32.156,19.05 32.156,19.177 ; 32.156,19.787 32.156,20.091 ; 32.182,16.662 32.182,17.704 ; 32.182,19.126 32.182,19.177 ; 32.182,19.787 32.182,20.142 ; 32.207,16.612 32.207,17.653 ; 32.207,19.787 32.207,20.193 ; 32.233,16.586 32.233,17.577 ; 32.233,19.787 32.233,20.218 ; 32.258,16.561 32.258,17.551 ; 32.258,19.787 32.258,20.244 ; 32.283,16.535 32.283,17.501 ; 32.283,19.787 32.283,20.269 ; 32.309,16.51 32.309,17.45 ; 32.309,19.787 32.309,20.295 ; 32.334,16.51 32.334,17.374 ; 32.334,19.787 32.334,20.295 ; 32.36,16.485 32.36,17.323 ; 32.36,19.787 32.36,20.32 ; 32.385,16.485 32.385,17.297 ; 32.385,19.787 32.385,20.32 ; 32.41,16.485 32.41,17.221 ; 32.41,19.787 32.41,20.345 ; 32.436,16.459 32.436,17.196 ; 32.436,19.787 32.436,20.345 ; 32.461,16.459 32.461,17.145 ; 32.461,19.787 32.461,20.345 ; 32.487,16.459 32.487,17.094 ; 32.487,19.787 32.487,20.345 ; 32.512,16.459 32.512,17.043 ; 32.512,19.787 32.512,20.345 ; 32.537,16.459 32.537,16.967 ; 32.537,19.837 32.537,20.345 ; 32.563,16.459 32.563,16.942 ; 32.563,19.888 32.563,20.345 ; 32.588,16.459 32.588,16.866 ; 32.588,19.939 32.588,20.345 ; 32.614,16.459 32.614,16.84 ; 32.614,19.99 32.614,20.345 ; 32.639,16.459 32.639,16.764 ; 32.639,20.041 32.639,20.345 ; 32.664,16.459 32.664,16.739 ; 32.664,20.091 32.664,20.345 ; 32.69,16.459 32.69,16.713 ; 32.69,20.117 32.69,20.345 ; 32.715,16.459 32.715,16.688 ; 32.715,20.117 32.715,20.345 ; 32.741,16.459 32.741,16.688 ; 32.741,20.117 32.741,20.345 ; 32.766,16.459 32.766,16.688 ; 32.766,20.117 32.766,20.345 ; 32.791,16.459 32.791,16.713 ; 32.791,20.117 32.791,20.345 ; 32.817,16.459 32.817,16.739 ; 32.817,20.091 32.817,20.345 ; 32.842,16.459 32.842,16.789 ; 32.842,20.015 32.842,20.345 ; 32.868,16.459 32.868,16.84 ; 32.868,19.99 32.868,20.345 ; 32.893,16.459 32.893,16.891 ; 32.893,19.914 32.893,20.345 ; 32.918,16.104 32.918,16.358 ; 32.918,16.459 32.918,16.942 ; 32.918,19.888 32.918,20.345 ; 32.918,20.447 32.918,20.701 ; 32.944,16.104 32.944,16.358 ; 32.944,16.459 32.944,16.993 ; 32.944,19.812 32.944,20.345 ; 32.944,20.447 32.944,20.726 ; 32.969,16.078 32.969,16.358 ; 32.969,16.459 32.969,17.043 ; 32.969,19.761 32.969,20.345 ; 32.969,20.447 32.969,20.726 ; 32.995,16.078 32.995,16.358 ; 32.995,16.459 32.995,17.094 ; 32.995,19.71 32.995,20.345 ; 32.995,20.447 32.995,20.726 ; 33.02,16.078 33.02,16.358 ; 33.02,16.459 33.02,17.145 ; 33.02,19.66 33.02,20.345 ; 33.02,20.447 33.02,20.752 ; 33.045,16.078 33.045,16.358 ; 33.045,16.459 33.045,17.196 ; 33.045,19.609 33.045,20.345 ; 33.045,20.447 33.045,20.752 ; 33.071,16.078 33.071,16.358 ; 33.071,16.459 33.071,17.247 ; 33.071,19.558 33.071,20.345 ; 33.071,20.447 33.071,20.752 ; 33.096,16.078 33.096,16.358 ; 33.096,16.459 33.096,17.297 ; 33.096,19.507 33.096,20.345 ; 33.096,20.447 33.096,20.752 ; 33.122,16.078 33.122,16.358 ; 33.122,16.459 33.122,17.348 ; 33.122,19.456 33.122,20.345 ; 33.122,20.447 33.122,20.752 ; 33.147,16.078 33.147,16.358 ; 33.147,16.459 33.147,17.399 ; 33.147,19.431 33.147,20.345 ; 33.147,20.447 33.147,20.726 ; 33.172,16.078 33.172,16.358 ; 33.172,16.459 33.172,17.45 ; 33.172,19.355 33.172,20.345 ; 33.172,20.447 33.172,20.726 ; 33.198,16.078 33.198,16.358 ; 33.198,16.459 33.198,17.501 ; 33.198,19.304 33.198,20.345 ; 33.198,20.447 33.198,20.726 ; 33.223,16.104 33.223,16.358 ; 33.223,16.459 33.223,17.551 ; 33.223,19.253 33.223,20.345 ; 33.223,20.447 33.223,20.701 ; 33.249,16.459 33.249,17.602 ; 33.249,19.202 33.249,20.345 ; 33.274,16.459 33.274,17.653 ; 33.274,19.152 33.274,20.345 ; 33.299,16.459 33.299,17.704 ; 33.299,19.101 33.299,20.345 ; 33.325,16.459 33.325,17.755 ; 33.325,19.05 33.325,20.345 ; 33.35,16.459 33.35,17.805 ; 33.35,18.999 33.35,20.345 ; 33.376,16.459 33.376,17.856 ; 33.376,18.948 33.376,20.345 ; 33.401,16.459 33.401,17.907 ; 33.401,18.898 33.401,20.345 ; 33.426,16.459 33.426,17.958 ; 33.426,18.847 33.426,20.345 ; 33.452,16.129 33.452,16.358 ; 33.452,16.459 33.452,18.009 ; 33.452,18.796 33.452,20.345 ; 33.452,20.447 33.452,20.676 ; 33.477,16.104 33.477,16.358 ; 33.477,16.459 33.477,18.059 ; 33.477,18.745 33.477,20.345 ; 33.477,20.447 33.477,20.726 ; 33.503,16.078 33.503,16.358 ; 33.503,16.459 33.503,18.11 ; 33.503,18.694 33.503,20.345 ; 33.503,20.447 33.503,20.726 ; 33.528,16.078 33.528,16.358 ; 33.528,16.459 33.528,18.161 ; 33.528,18.644 33.528,20.345 ; 33.528,20.447 33.528,20.726 ; 33.553,16.078 33.553,16.358 ; 33.553,16.459 33.553,18.212 ; 33.553,18.593 33.553,20.345 ; 33.553,20.447 33.553,20.726 ; 33.579,16.078 33.579,16.358 ; 33.579,16.459 33.579,18.263 ; 33.579,18.542 33.579,20.345 ; 33.579,20.447 33.579,20.752 ; 33.604,16.078 33.604,16.358 ; 33.604,16.459 33.604,18.339 ; 33.604,18.491 33.604,20.345 ; 33.604,20.447 33.604,20.752 ; 33.63,16.078 33.63,16.358 ; 33.63,16.459 33.63,18.364 ; 33.63,18.44 33.63,20.345 ; 33.63,20.447 33.63,20.752 ; 33.655,16.078 33.655,16.358 ; 33.655,16.459 33.655,20.345 ; 33.655,20.447 33.655,20.752 ; 33.68,16.078 33.68,16.358 ; 33.68,16.459 33.68,20.345 ; 33.68,20.447 33.68,20.726 ; 33.706,16.078 33.706,16.358 ; 33.706,16.459 33.706,20.345 ; 33.706,20.447 33.706,20.726 ; 33.731,16.078 33.731,16.358 ; 33.731,16.459 33.731,20.345 ; 33.731,20.447 33.731,20.726 ; 33.757,16.104 33.757,16.358 ; 33.757,16.459 33.757,20.345 ; 33.757,20.447 33.757,20.726 ; 33.782,16.129 33.782,16.358 ; 33.782,16.459 33.782,20.345 ; 33.782,20.447 33.782,20.676 ; 33.807,16.459 33.807,20.345 ; 33.833,16.459 33.833,20.345 ; 33.858,16.459 33.858,20.345 ; 33.884,16.459 33.884,20.345 ; 33.909,16.459 33.909,20.345 ; 33.934,16.459 33.934,20.345 ; 33.96,16.459 33.96,20.345 ; 33.985,16.459 33.985,20.345 ; 34.011,16.104 34.011,16.358 ; 34.011,16.459 34.011,20.345 ; 34.011,20.447 34.011,20.701 ; 34.036,16.078 34.036,16.358 ; 34.036,16.459 34.036,20.345 ; 34.036,20.447 34.036,20.726 ; 34.061,16.078 34.061,16.358 ; 34.061,16.459 34.061,20.345 ; 34.061,20.447 34.061,20.726 ; 34.087,16.078 34.087,16.358 ; 34.087,16.459 34.087,20.345 ; 34.087,20.447 34.087,20.726 ; 34.112,16.078 34.112,16.358 ; 34.112,16.459 34.112,20.345 ; 34.112,20.447 34.112,20.752 ; 34.138,16.078 34.138,16.358 ; 34.138,16.459 34.138,20.345 ; 34.138,20.447 34.138,20.752 ; 34.163,16.078 34.163,16.358 ; 34.163,16.459 34.163,20.345 ; 34.163,20.447 34.163,20.752 ; 34.188,16.078 34.188,16.358 ; 34.188,16.459 34.188,20.345 ; 34.188,20.447 34.188,20.752 ; 34.214,16.078 34.214,16.358 ; 34.214,16.459 34.214,20.345 ; 34.214,20.447 34.214,20.752 ; 34.239,16.078 34.239,16.358 ; 34.239,16.459 34.239,20.345 ; 34.239,20.447 34.239,20.726 ; 34.265,16.078 34.265,16.358 ; 34.265,16.459 34.265,20.345 ; 34.265,20.447 34.265,20.726 ; 34.29,16.104 34.29,16.358 ; 34.29,16.459 34.29,20.345 ; 34.29,20.447 34.29,20.726 ; 34.315,16.104 34.315,16.358 ; 34.315,16.459 34.315,20.345 ; 34.315,20.447 34.315,20.701 ; 34.341,16.459 34.341,20.345 ; 34.366,16.459 34.366,20.345 ; 34.392,16.459 34.392,20.345 ; 34.417,16.459 34.417,20.345 ; 34.442,16.459 34.442,20.345 ; 34.468,16.459 34.468,20.345 ; 34.493,16.459 34.493,20.345 ; 34.519,16.459 34.519,20.345 ; 34.544,16.104 34.544,16.358 ; 34.544,16.459 34.544,20.345 ; 34.544,20.447 34.544,20.701 ; 34.569,16.104 34.569,16.358 ; 34.569,16.459 34.569,20.345 ; 34.569,20.447 34.569,20.726 ; 34.595,16.078 34.595,16.358 ; 34.595,16.459 34.595,20.345 ; 34.595,20.447 34.595,20.726 ; 34.62,16.078 34.62,16.358 ; 34.62,16.459 34.62,20.345 ; 34.62,20.447 34.62,20.726 ; 34.646,16.078 34.646,16.358 ; 34.646,16.459 34.646,20.345 ; 34.646,20.447 34.646,20.752 ; 34.671,16.078 34.671,16.358 ; 34.671,16.459 34.671,20.345 ; 34.671,20.447 34.671,20.752 ; 34.696,16.078 34.696,16.358 ; 34.696,16.459 34.696,20.345 ; 34.696,20.447 34.696,20.752 ; 34.722,16.078 34.722,16.358 ; 34.722,16.459 34.722,20.345 ; 34.722,20.447 34.722,20.752 ; 34.747,16.078 34.747,16.358 ; 34.747,16.459 34.747,20.345 ; 34.747,20.447 34.747,20.752 ; 34.773,16.078 34.773,16.358 ; 34.773,16.459 34.773,20.345 ; 34.773,20.447 34.773,20.726 ; 34.798,16.078 34.798,16.358 ; 34.798,16.459 34.798,20.345 ; 34.798,20.447 34.798,20.726 ; 34.823,16.078 34.823,16.358 ; 34.823,16.459 34.823,20.345 ; 34.823,20.447 34.823,20.726 ; 34.849,16.104 34.849,16.358 ; 34.849,16.459 34.849,20.345 ; 34.849,20.447 34.849,20.701 ; 34.874,16.459 34.874,20.345 ; 34.9,16.459 34.9,20.345 ; 34.925,16.485 34.925,20.345 ; 34.95,16.485 34.95,20.32 ; 34.976,16.485 34.976,20.32 ; 35.001,16.51 35.001,20.295 ; 35.027,16.51 35.027,20.295 ; 35.052,16.535 35.052,20.269 ; 35.077,16.561 35.077,20.244 ; 35.103,16.586 35.103,20.218 ; 35.128,16.612 35.128,20.193 ; 35.154,16.662 35.154,20.168 ; 35.179,16.713 35.179,20.091 ; 35.306,17.424 35.306,17.78 ; 35.306,17.958 35.306,18.313 ; 35.306,18.517 35.306,18.847 ; 35.306,19.05 35.306,19.38 ; 35.331,17.424 35.331,17.78 ; 35.331,17.958 35.331,18.313 ; 35.331,18.517 35.331,18.847 ; 35.331,19.05 35.331,19.38 ; 35.357,17.424 35.357,17.78 ; 35.357,17.958 35.357,18.313 ; 35.357,18.517 35.357,18.847 ; 35.357,19.05 35.357,19.38 ; 35.382,17.424 35.382,17.78 ; 35.382,17.958 35.382,18.313 ; 35.382,18.517 35.382,18.847 ; 35.382,19.05 35.382,19.38 ; 35.408,17.424 35.408,17.78 ; 35.408,17.958 35.408,18.313 ; 35.408,18.517 35.408,18.847 ; 35.408,19.05 35.408,19.38 ; 35.433,17.424 35.433,17.78 ; 35.433,17.958 35.433,18.313 ; 35.433,18.517 35.433,18.847 ; 35.433,19.05 35.433,19.38 ; 35.458,17.424 35.458,17.78 ; 35.458,17.958 35.458,18.313 ; 35.458,18.517 35.458,18.847 ; 35.458,19.05 35.458,19.38 ; 35.484,17.424 35.484,17.78 ; 35.484,17.958 35.484,18.313 ; 35.484,18.517 35.484,18.847 ; 35.484,19.05 35.484,19.38 ; 35.509,17.424 35.509,17.78 ; 35.509,17.958 35.509,18.313 ; 35.509,18.517 35.509,18.847 ; 35.509,19.05 35.509,19.38 ; 35.535,17.424 35.535,17.755 ; 35.535,17.983 35.535,18.288 ; 35.535,18.517 35.535,18.821 ; 35.535,19.05 35.535,19.38 ; 35.56,17.475 35.56,17.729 ; 35.56,18.009 35.56,18.263 ; 35.56,18.542 35.56,18.796 ; 35.56,19.101 35.56,19.355

## Polygon pours and split planes (outlines as drawn)
3.3V on Bottom "3.3V" (hatched 90Degree grid 1 track 1, remove dead copper, pour order 12): 36.398,60.046 57.785,60.046 57.81,60.071 57.81,46.787 36.398,46.787
3.3V on Bottom "3.3V" (hatched 90Degree grid 1 track 1, remove dead copper, pour order 2): 56.007,54.28 56.007,49.53 56.007,45.085 61.9,45.085 68.072,45.085 68.072,44.806 68.072,54.28 64.973,54.28 61.9,54.28
V_BATT on Bottom "V_Bat" (hatched Horizontal grid 1 track 1, pour order 5): 42.088,68.021 46.609,68.021 51.968,61.722 42.088,61.722
GND on Bottom "GND" (hatched 90Degree grid 1 track 1, pour order 7): 59.715,58.369 59.715,61.112 59.817,61.214 63.398,61.214 63.398,62.306 64.084,62.992 68.123,62.992 68.123,54.61 68.453,54.28 59.665,54.28
GND on Bottom "GND" (hatched Vertical grid 1.5 track 1.5, remove dead copper, pour order 11): 46.507,36.17 52.197,36.17 55.931,36.17 55.931,38.227 55.931,38.71 55.931,43.586 68.148,43.586 68.402,43.332 68.453,43.282 68.453,13.564 46.507,13.564
3.3V on Bottom "3.3V" (hatched 45Degree grid 1.5 track 1.5, pour order 13): 27.102,26.01 45.415,26.01 45.415,21.869 53.924,13.36 53.823,13.462 27.102,13.462

## Keep-outs
Keep-Out Layer:
  the board outline again, w0.254

## Other copper
Top:
  rectangle net 5V: 61.697,47.625 67.361,48.946
  rectangle net GND: 57.404,56.236 62.738,58.953
  rectangle net GND: 62.128,55.143 62.738,56.794
  rectangle net GND: 63.932,55.245 64.491,58.953
  rectangle net GND: 62.738,56.464 64.059,58.953
  rectangle net GND: 63.348,55.118 64.491,55.245
  rectangle net 5V: 43.409,61.519 58.09,63.881
  rectangle net GND: 34.773,66.472 58.725,70.358
  rectangle net GND: 58.725,67.513 67.97,70.358
  rectangle net 5V: 43.409,63.703 56.921,65.862
  rectangle net 5V: 57.379,59.614 66.7,60.35
  rectangle net 5V: 66.7,48.158 67.361,59.995
  rectangle net 5V: 58.649,59.893 59.157,61.874
  rectangle net 5V: 61.697,48.438 64.465,52.908
  rectangle net V_BATT: 27.686,64.059 33.68,70.409
  rectangle net V_BATT: 33.376,64.059 38.557,65.888
  rectangle net V_BATT: 35.408,59.944 38.557,64.059
  rectangle net V_BATT: 27.686,59.944 29.921,64.059
  rectangle net V_BATT: 29.921,59.944 35.738,61.011
  rectangle net 5V: 57.379,59.893 58.649,61.874
  rectangle net 5V: 66.7,59.614 67.361,60.35
  rectangle net 3.3V: 59.573,60.935 65.354,62.753
  rectangle net 5V: 57.734,61.544 59.157,63.906
  rectangle net 5V: 56.921,62.941 58.166,65.862
  rectangle net 5V: 57.963,63.652 58.725,64.567
  text "2015" at 35.789,14.618 h1 r90
  text "Battery Oprated Board" at 36.754,14.567 h0.7 r90
Bottom:
  rectangle net GND: 65.634,62.992 68.123,70.587
  rectangle net GND: 60.833,68.834 66.7,70.256
  rectangle net GND: 54.407,57.302 61.316,58.369
  rectangle net GND: 27.686,64.119 34.9,70.587
  rectangle net GND: 33.884,70.002 66.294,70.587
  rectangle net GND: 37.795,63.525 41.529,66.599
  rectangle net GND: 58.014,55.22 61.925,57.81
  rectangle net V_BATT: 46.076,68.021 46.609,69.088
  rectangle net GND: 37.795,66.142 44.094,67.31
  rectangle net GND: 59.715,57.15 64.186,58.903
  rectangle net 3.3V: 62.484,61.214 65.1,68.555
  rectangle net 3.3V: 60.198,61.214 63.602,64.719
  rectangle net NetCU2_2: 52.095,61.163 56.159,66.7
  rectangle net V_BATT: 35.89,67.64 46.761,69.088
  rectangle net GND: 40.513,35.66 41.859,36.906

## Silkscreen, mask and mechanical layers (free items; w line width, h text height)
Top Overlay:
  text "RX" at 44.145,56.236 h0.86 r90
  text "TX" at 40.742,56.185 h0.86 r90
Dimension:
  lines w0.254: 25.197,69.545 25.705,71.069 ; 25.222,16.84 25.73,15.316 ; 25.451,71.069 25.959,71.069 ; 25.476,15.316 25.984,15.316 ; 25.714,51.217 25.705,71.069 ; 25.721,35.169 25.73,15.316 ; 26.213,69.545 25.705,71.069 ; 26.238,16.84 25.73,15.316 ; 27.178,11.836 27.178,12.344 ; 28.701,12.601 27.178,12.09 ; 28.703,11.585 27.178,12.09 ; 40.001,12.11 27.178,12.09 ; 55.541,12.135 68.365,12.155 ; 66.84,12.66 68.365,12.155 ; 66.841,11.644 68.365,12.155 ; 68.364,12.409 68.365,11.901
  text "55.753 (mm)" at 24.8,50.962 h1.52 r270.03
  text "41.187 (mm)" at 40.257,11.197 h1.52 r0.09
tDocu:
  text "Mike Hord" at -32.15,50.4 h1.51
  text "Revised by: Kade Jensen" at -52.47,47.86 h1.51

## Text inside footprints (layer, text, board x,y; h text height)
A: tNames ">NAME" at 67.437,40.878 h0.69 r270; tValues ">VALUE" at 65.024,41.148 h0.69 r270; tFinish ">name" at 65.075,41.095 h0.69 r270
C_BAT: tNames ">NAME" at 35.634,66.167 h1.57 r180; tValues ">VALUE" at 35.634,69.158 h1.57 r180
C_usb: tNames ">NAME" at 54.051,67.587 h1.57 r270; tValues ">VALUE" at 51.06,67.587 h1.57 r270
D: tNames ">NAME" at 67.437,25.816 h0.69 r270; tValues ">VALUE" at 65.024,26.086 h0.69 r270; tFinish ">name" at 65.075,26.033 h0.69 r270
I2C: tNames ">NAME" at 53.883,13.894 h0.69 r180; tValues ">VALUE" at 54.153,16.307 h0.69 r180; tFinish ">name" at 54.1,16.256 h0.69 r180
JP1: tDocu "-" at 32.461,67.513 h1.97 r180; tDocu "+" at 37.541,67.513 h1.97 r180
S1: tNames ">Name" at 66.751,67.005 h0.94 r270